# Altium PCB koruza-hs-rigid-PCB.PcbDoc
Units mm, origin at the board's own origin, x right, y up, seen from the top; angles counter-clockwise.
Board outline 41.5 x 65 mm, 2 copper layers (Top Layer, Bottom Layer), stack 0.325 mm thick; 40 components, 27 nets, 153 pads, 29 vias.
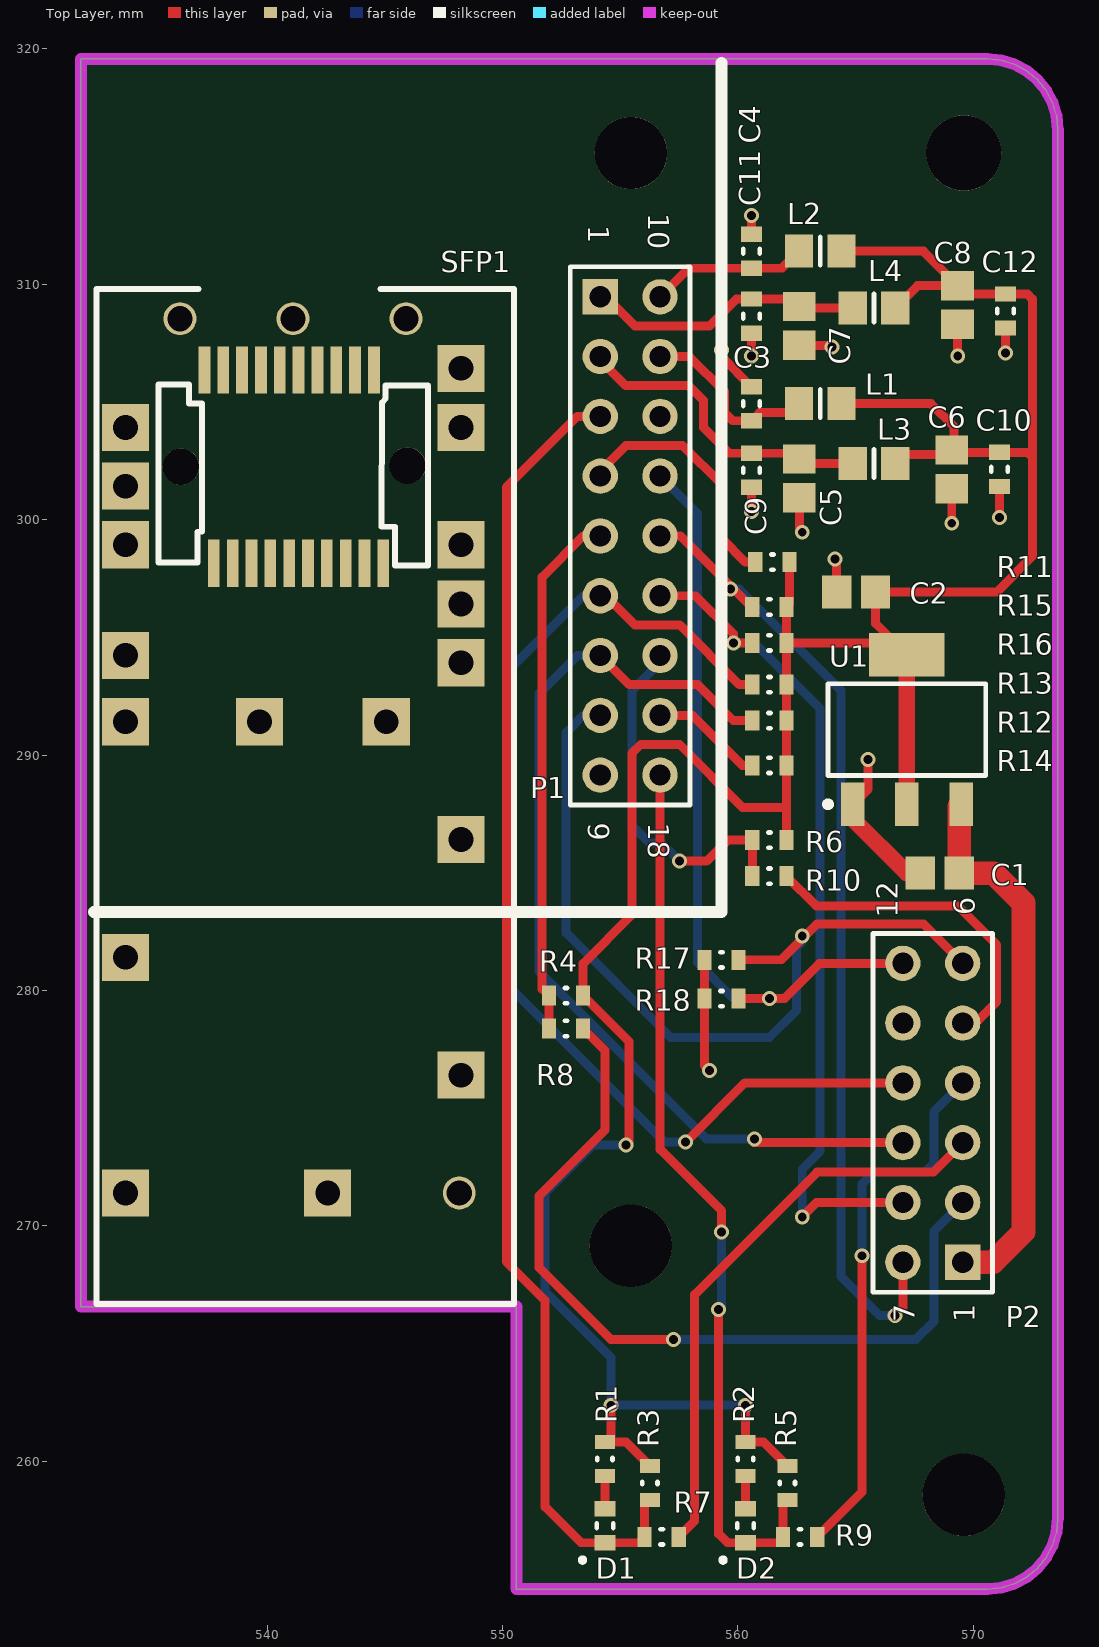
[diagram p0: Top Layer view]
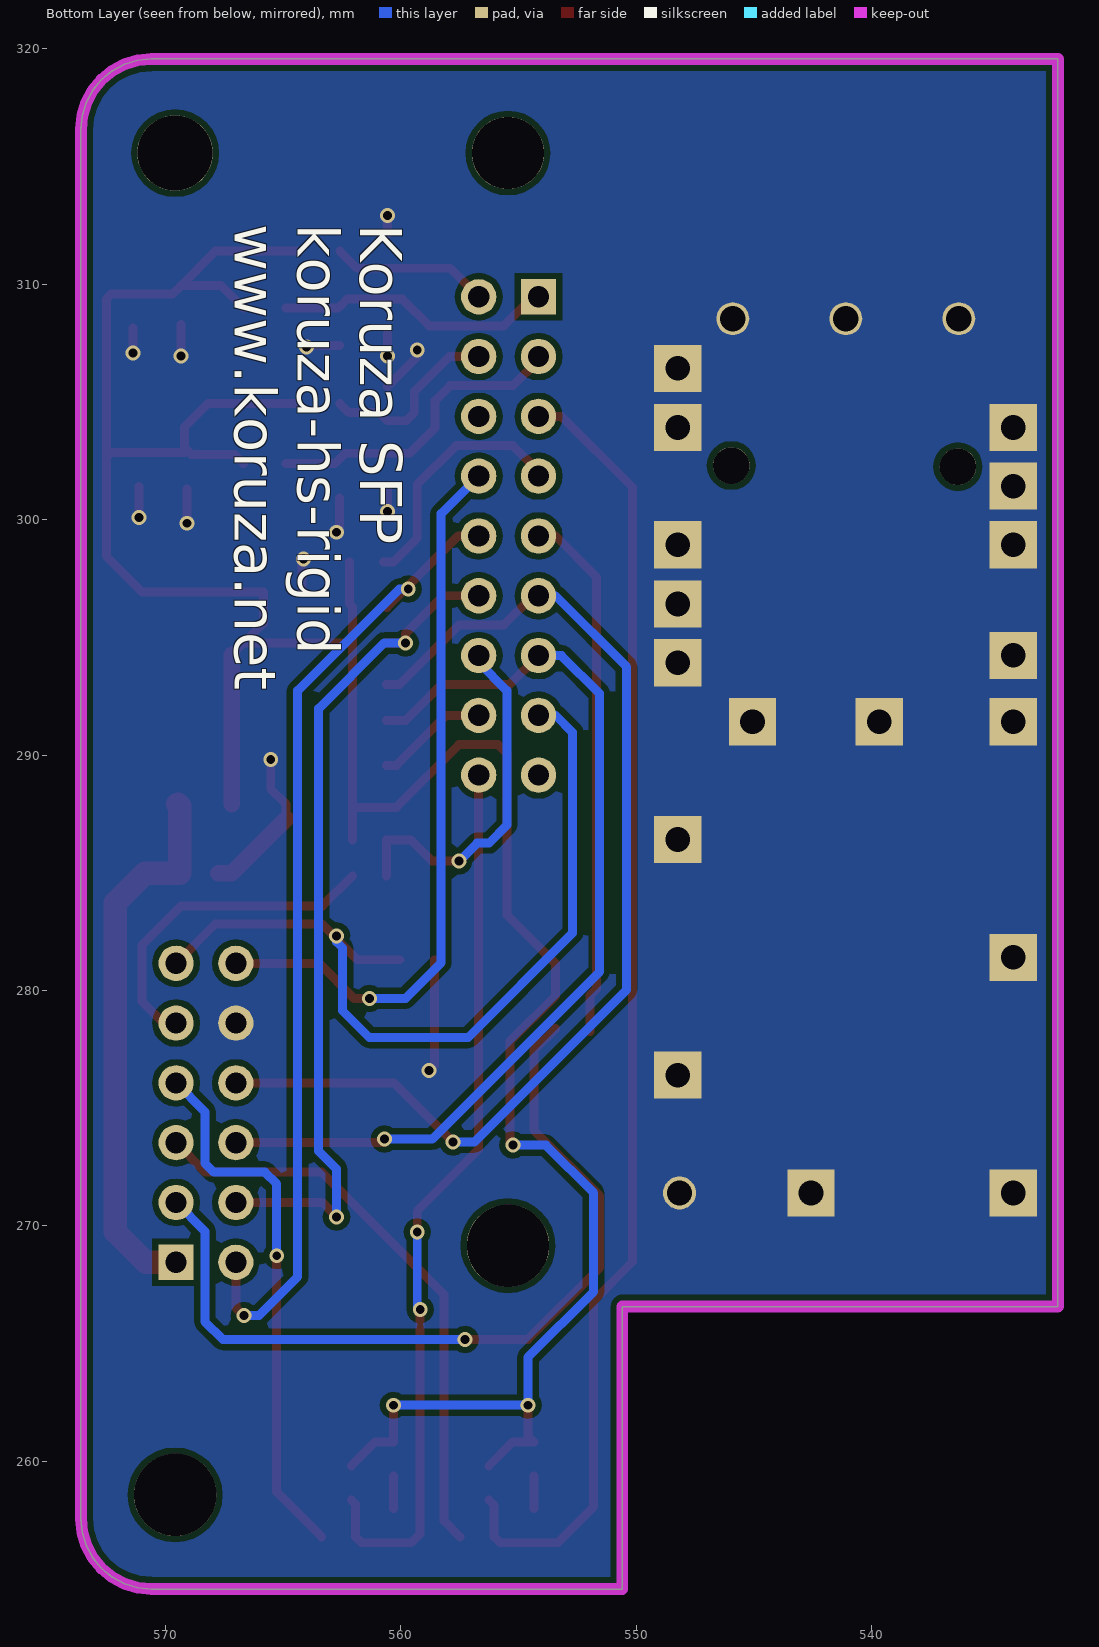
[diagram p1: Bottom Layer view, seen from below]
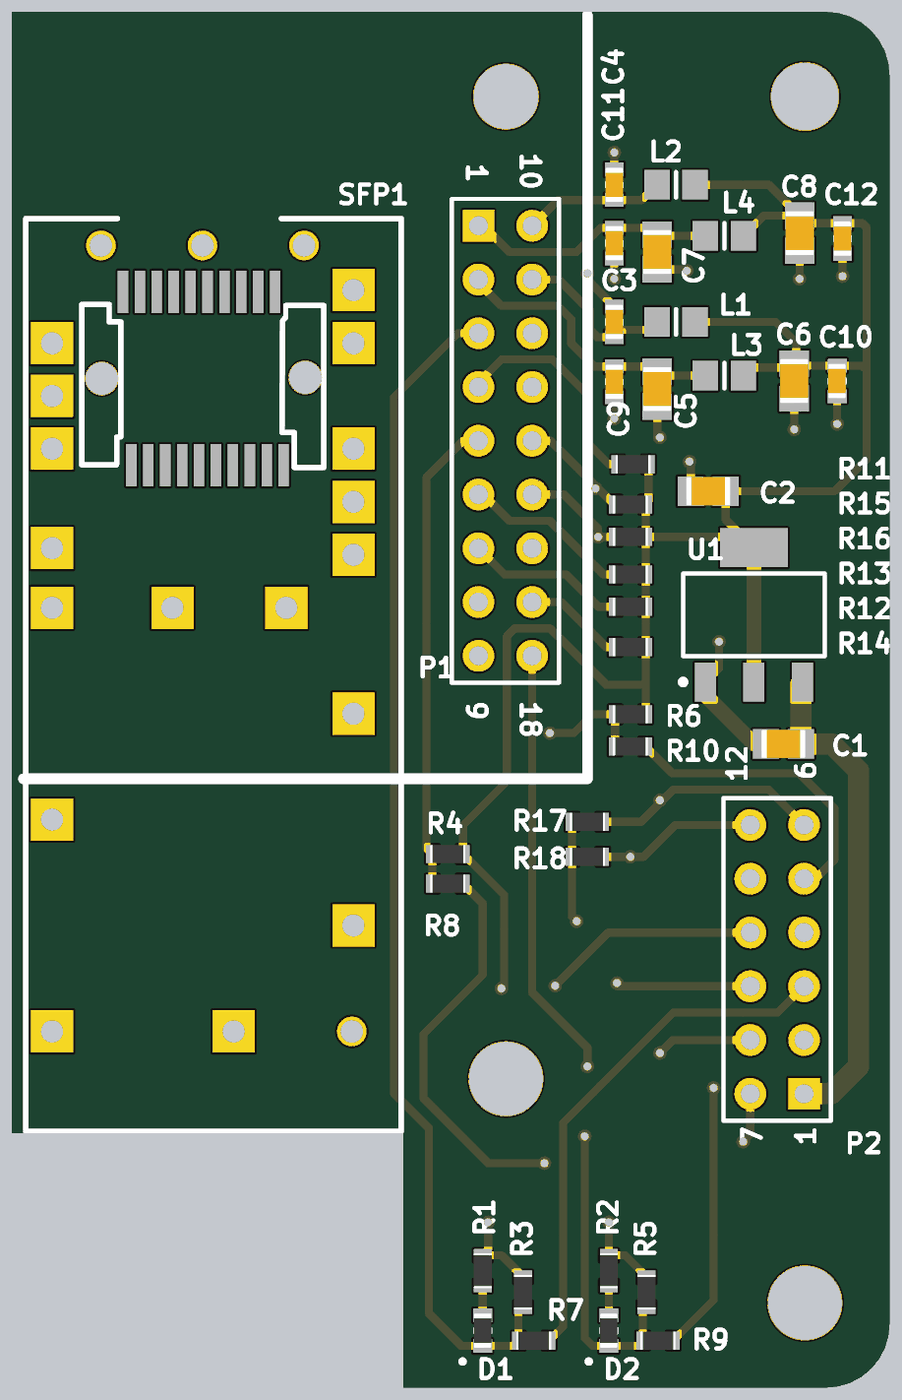
[diagram p2: 3D render of the assembled board from above, using the file's embedded part models]

## Layer stack, top to bottom
Top Solder: solder mask 0.0102, Solder Resist, Dk 3.5
Top Layer: signal copper 0.0356
Dielectric 1: core 0.254, FR-4, Dk 4.2
Bottom Layer: signal copper 0.0356
Solder Side: solder mask 0.0102, Solder Resist, Dk 3.5

## Board outline
570.595,319.572 532.095,319.572 532.095,266.572 550.595,266.572 550.595,254.572 570.595,254.572 571.18,254.63 571.743,254.8 572.262,255.078 572.716,255.451 573.089,255.905 573.367,256.424 573.537,256.987 573.595,257.572 573.595,316.572 573.537,317.157 573.367,317.72 573.089,318.239 572.716,318.693 572.262,319.066 571.743,319.344 571.18,319.514

## Design rules (kind name [scope] priority, off if disabled: settings)
Clearance Clearance_diff_polygon [InPolygon] p1: gap=0.254
Clearance [All] p2: gap=0.152
Clearance Clearance_nets_poligon [InNamedPolygon('GND_P') vs not InNet('GND')] p3 off: gap=0.254
Clearance Clearance_diff_gnd [(InDifferentialPairClass('All Differential Pairs')) and not (InPadClass('All Pads')) vs InNet('GND')] p4: gap=0.254
Clearance Clearance_diff_gnd_pad [(InDifferentialPairClass('All Differential Pairs')) vs IsPad and InNet('GND')] p5: gap=0.254
ComponentClearance [All] p1: gap=0 collisioncheckmode=3 verticalgap=0 showdistances=TRUE
DiffPairsRouting [All] p1: maxlimit=0.18 minlimit=0.175 mostfreqgap=0.178 toplayer_minwidth=0.203 toplayer_maxwidth=0.229 toplayer_prefwidth=0.216 bottomlayer_minwidth=0.203 bottomlayer_maxwidth=0.229 bottomlayer_prefwidth=0.216 maxuncoupledlength=5.08
HoleSize [All] p1: absolutevalues=TRUE maxlimit=5 minlimit=0.3 maxpercent=80.000 minpercent=20.000
MatchedLengths camera [InDifferentialPairClass('CAMERA_DIFF')] p1: tolerance=0.254 checknetsindiffpair=TRUE checkdiffpairvsdiffpair=FALSE checkxsignals=FALSE checkothers=FALSE
MinimumSolderMaskSliver [All] p1: minsoldermaskwidth=0.05
PlaneConnect [All] p1: planeconnectstyle=Direct reliefexpansion=0.508 reliefentries=2 reliefconductorwidth=0.254 reliefairgap=0.254
PolygonConnect [All] p1: connectstyle=Direct reliefconductorwidth=0.254 reliefentries=4 polygonreliefangle="90 Angle" airgapwidth=0.254
RoutingVias [All] p1: holewidth=0.38 width=0.635 viastyle="Through Hole" minholewidth=0.3 minwidth=0.508 maxholewidth=0.711 maxwidth=1.27
SilkToSolderMaskClearance [IsPad] p1: minsilkscreentomaskgap=0 clearancetoexposedcopper=TRUE
SolderMaskExpansion [All] p1: expansion=0.102
Width [All] p1: maxlimit=2 minlimit=0.152 preferedwidth=0.203 minimp=50.000000 maximp=50.000000 favimp=50.000000
24 further rules are at their usual default settings.

## Components (designator, comment, footprint, x,y, rotation, side; value= is the part's Value field where it differs from the comment)
C1 "10uF" CAP0805 568.579,284.988 r180 top
C2 "10uF" CAP0805 565.023,296.926 r180 top
C3 "100nF" CAP0603 560.578,304.927 r270 top
C4 "100nF" CAP0603 560.578,311.404 r270 top
C5 "10uF" CAP0805 562.61,301.752 r270 top
C6 "10uF" CAP0805 569.087,302.133 r270 top
C7 "10uF" CAP0805 562.61,308.229 r270 top
C8 "10uF" CAP0805 569.341,309.118 r270 top
C9 "100nF" CAP0603 560.578,302.096 r90 top
C10 "100nF" CAP0603 571.119,302.133 r90 top
C11 "100nF" CAP0603 560.578,308.647 r90 top
C12 "100nF" CAP0603 571.373,308.864 r90 top
D1 "LED0" DIODE0603 554.355,257.265 r270 top
D2 "LED0" DIODE0603 560.324,257.265 r270 top
L1 "1uH" 6-0805_N 563.499,304.927 r0 top
L2 "1uH" 6-0805_N 563.499,311.404 r0 top
L3 "1uH" 6-0805_N 565.785,302.387 r0 top
L4 "1uH" 6-0805_N 565.785,308.991 r0 top
P1 "Header 9X2A" HDR2X9_CEN 554.156,309.468 r270 top locked
P2 "Header 6X2A" HDR2X6_CEN 569.552,268.455 r90 top locked
R1 "470R" RES0603 554.355,260.096 r90 top
R2 "470R" RES0603 560.324,260.096 r90 top
R3 "0R" RES0603 556.26,259.08 r270 top
R4 "0R" RES0603 552.704,279.781 r180 top
R5 "0R" RES0603 562.102,259.08 r270 top
R6 "0R" RES0603 561.34,286.385 r180 top
R7 "0R" RES0603 556.768,256.794 r0 top
R8 "0R" RES0603 552.704,278.384 r0 top
R9 "0R" RES0603 562.647,256.794 r0 top
R10 "0R" RES0603 561.34,284.861 r0 top
R11 "0R" RES0603 561.467,298.196 r180 top
R12 "0R" RES0603 561.34,291.465 r180 top
R13 "0R" RES0603 561.34,292.989 r180 top
R14 "0R" RES0603 561.34,289.56 r180 top
R15 "0R" RES0603 561.34,296.291 r180 top
R16 "0R" RES0603 561.34,294.767 r180 top
R17 "0R" RES0603 559.308,281.305 r180 top
R18 "0R" RES0603 559.308,279.654 r180 top
SFP1 "SFP connector" PCB_SFP_COVER 537.742,298.149 r270 top
U1 "REG1117" TI-DCY4_N 567.182,291.084 r90 top

## Footprints (in the part's own frame and the unit in brackets; to place one, negate y for a bottom-side part, rotate by r counter-clockwise, add the part's x,y. Pads: shape width x height; smd on the part's side, far side on the other; paste and mask are expansions set on the pad)
6-0805_N [mm] "Chip Resistor, Body 2.0x1.2mm, IPC Medium Density"
  rect 1.2x1.4 smd: 1(-0.9,0) 2(0.9,0)
  silkscreen extent 0,-0.6 0,0.6, body extent -1.07,-0.7 1.07,0.7, height 0.7
CAP0603 [mm]
  rect 0.65x0.9 smd: 1(-0.725,0) 2(0.725,0)
  silkscreen extent -0.1,-0.35 0.1,0.35, body extent -0.82,-0.43 0.82,0.43, height 0.5
CAP0805 [mm]
  rect 1.25x1.4 smd: 1(-0.825,0) 2(0.825,0)
  body extent -1.05,-0.67 1.05,0.67, height 0.5
DIODE0603 [mm]
  rect 0.65x0.9 smd: 1(-0.725,0) 2(0.725,0)
  silkscreen extent -0.1,-1.05 1.56,0.35, body extent -0.82,-0.43 0.82,0.43, height 0.5
HDR2X6_CEN [mm] "Connector; Header; 6x2 Position"
  rect 1.5x1.5 hole 0.9: 1(0,0)
  round 1.5 hole 0.9: 2(2.54,0) 3(5.08,0) 4(7.62,0) 5(10.16,0) 6(12.7,0) 7(0,2.54) 8(2.54,2.54) 9(5.08,2.54) 10(7.62,2.54) 11(10.16,2.54) 12(12.7,2.54)
  silkscreen extent -1.27,-1.27 13.97,3.81
HDR2X9_CEN [mm] "Connector; Header; 9x2 Position"
  rect 1.5x1.5 hole 0.9: 1(0,0)
  round 1.5 hole 0.9: 2(2.54,0) 3(5.08,0) 4(7.62,0) 5(10.16,0) 6(12.7,0) 7(15.24,0) 8(17.78,0) 9(20.32,0) 10(0,2.54) 11(2.54,2.54) 12(5.08,2.54) 13(7.62,2.54) 14(10.16,2.54) 15(12.7,2.54) 16(15.24,2.54) 17(17.78,2.54) 18(20.32,2.54)
  silkscreen extent -1.27,-1.27 21.59,3.81
PCB_SFP_COVER [mm]
  rect 2x0.5 smd: 1(0,0) 2(0,0.8) 3(0,1.6) 4(0,2.4) 5(0,3.2) 6(0,4) 7(0,4.8) 8(0,5.6) 9(0,6.4) 10(0,7.2) 11(-8.2,6.8) 12(-8.2,6) 13(-8.2,5.2) 14(-8.2,4.4) 15(-8.2,3.6) 16(-8.2,2.8) 17(-8.2,2) 18(-8.2,1.2) 19(-8.2,0.4) 20(-8.2,-0.4)
  round 1.4 hole 1.067: 21(-10.387,8.163) 21(-10.387,-1.439) 21(-10.387,3.361) 21(26.75,10.425)
  rect 2x2 hole 1.05: 21(-8.279,10.499) 21(-5.764,10.499) 21(-5.764,-3.75) 21(-3.275,-3.75) 21(-0.786,10.499) 21(-0.786,-3.75) 21(1.729,10.499) 21(3.913,-3.75) 21(4.229,10.499) 21(6.733,7.324) 21(6.733,-3.75) 21(6.733,1.94) 21(11.736,10.499) 21(16.74,-3.75) 21(21.744,10.499) 21(26.748,-3.75) 21(26.748,4.835)
  round 1.55 hole 1.55: 35(-4.15,8.225) 36(-4.1,-1.4)
  silkscreen extent -11.66,-4.99 31.47,12.76
RES0603 [mm]
  rect 0.6x0.85 smd: 1(-0.725,0) 2(0.725,0)
  silkscreen extent -0.05,-0.33 0.05,0.33, body extent -0.82,-0.43 0.82,0.43, height 0.5
TI-DCY4_N [mm] "SOT223, 4-Leads, Body 6.5x3.5mm, Pitch 2.3mm, IPC Medium Density"
  rect 1.85x1 smd: 1(-3.175,2.3) 2(-3.175,0) 3(-3.175,-2.3)
  rect 1.85x3.2 smd: 4(3.175,0)
  silkscreen extent -3.3,-3.35 1.95,3.47, body extent -1.85,-3.35 1.85,3.35, height 1.8

## Part data
C1 C2 C5 C6 C7 C8: library part "Cap Pol1", "Polarized Capacitor (Radial)"
C3 C4 C9 C10 C11 C12: library part Cap, "Capacitor"
D1 D2: "Typical INFRARED GaAs LED"
L1 L2 L3 L4: library part Inductor, "Inductor"
P1: "Header, 9-Pin, Dual row"
P2: "Header, 6-Pin, Dual row"
R1 R2 R3 R4 R5 R6 R7 R8 R9 R10 R11 R12 R13 R14 R15 R16 R17 R18: library part Res1, "Resistor"
U1: "Single Output LDO, 800 mA, Adjustable 1.5 to 13.5 V Output, 3.8 to 15 V Input, with Internal Current Limiting, 4-pin SOT-223 (DCY), -40 to 125 degC, Green (RoHS & no Sb/Br)"

## Free pads (board coordinates)
  round 3.5 hole 3.5: 1(555.455,269.162) 1(569.595,258.572)
  round 3.073 hole 3.073: 1(555.455,315.572)
  round 3.2 hole 3.2: 1(569.595,315.572)

## Via types
v1: diameter 0.635, hole 0.38, Top Layer to Bottom Layer, tented both sides, 29 vias

## Nets (pads, with @x,y where several pads share a name; then routed paths per layer and width w, separated by ;. In a path a pad name is that pad's centre, name@x,y a point inside that pad or via, vN(x,y) a via of type N, cw(c..) or ccw(c..) an arc to the next point about the centre after c; other vN are vias at no path point)
+3V3: C2.1 C6.1 C8.1 C10.2 C12.2 L1.2 L2.2 L3.2 L4.2 R1.2 R2.2 R3.1 R4.1 R5.1 R6.1 R11.1 R12.1 R13.1 R14.1 R15.1 R16.1 U1.2 U1.4 | length 122.7
  Top Layer w0.381: v1(554.609,262.382) 554.609,261.075 R1.2 555.244,260.821 R3.1 ; v1(555.244,273.431) 555.371,273.558 555.371,277.839 R4.1 553.429,281.141 555.498,283.21 555.498,290.068 555.879,290.449 557.53,290.449 560.197,287.782 562.065,287.782 ; v1(560.324,262.382) R2.2 561.086,260.821 R5.1 ; R6.1 562.065,287.782 ; R11.1 562.192,296.418 R15.1 R16.1 ; L1.2 568.198,304.927 569.187,303.938 C6.1@569.187,302.858 ; L2.2 567.88,311.404 C8.1 ; L3.2 567.066,302.768 568.897,302.768 C6.1 C6.1@569.187,302.858 ; L4.2 567.637,309.943 C8.1 ; U1.4 U1.4@566.674,294.767 ; 572.389,302.768 572.299,302.858 C10.2 C6.1@569.187,302.858 ; 562.065,287.782 R14.1 R12.1 R13.1 R16.1 ; R16.1 U1.4@566.674,294.767 ; U1.4@566.674,294.767 565.848,295.593 C2.1 570.992,296.926 572.516,298.45 572.516,309.372 572.299,309.589 C12.2 569.695,309.589 C8.1
  Top Layer w0.7: U1.2 U1.4
  Bottom Layer w0.381: v1(555.244,273.431) 553.847,273.431 551.815,271.399 551.815,267.208 554.609,264.414 v1(554.609,262.382) v1(560.324,262.382)
+5V: C1.1 P2.1 U1.3 | length 23.3
  Top Layer w1: U1.3 569.404,287.831 C1.1 570.865,284.988 572.135,283.718 572.135,269.748 570.842,268.455 P2.1
GND: C1.2 C2.2 C3.1 C4.1 C5.2 C6.2 C7.2 C8.2 C9.1 C10.1 C11.1 C12.1 P2.11 R17.2 R18.2 SFP1.21 U1.1 | length 25.8
  Top Layer w0.381: R17.2 R18.2 558.583,276.823 v1(558.8,276.606) ; v1(559.308,307.213) 559.308,306.922 C3.1 ; v1(560.578,300.355) C9.1 ; v1(560.578,306.959) C11.1 ; C4.1 v1(560.578,312.928) ; C5.2 562.61,299.593 v1(562.737,299.466) ; C7.2 563.943,307.404 v1(564.007,307.34) ; v1(564.134,298.323) 564.198,298.259 C2.2 ; U1.1@564.882,287.288 U1.1 565.531,288.558 v1(565.531,289.814) ; v1(569.087,299.847) C6.2 ; v1(569.341,306.959) C8.2 ; v1(571.119,300.101) C10.1 ; v1(571.373,307.086) C12.1
  Top Layer w0.7: U1.1@564.882,287.288 567.182,284.988 C1.2
LOS_1: D1.2 P1.3 R3.2 R7.1 | length 55.8
  Top Layer w0.381: P1.3 553.181,304.388 550.164,301.371 550.164,268.478 551.815,266.827 551.815,258.064 553.339,256.54 D1.2 555.789,256.54 R7.1 556.043,258.138 R3.2
LOS_2: D2.2 P1.18 R5.2 R9.1 | length 38
  Top Layer w0.381: P1.18 556.696,273.249 559.308,270.637 v1(559.308,269.748) ; v1(559.181,266.446) 559.181,256.921 559.562,256.54 D2.2 561.668,256.54 R9.1 561.922,258.175 R5.2
  Bottom Layer w0.381: v1(559.181,266.446) 559.308,266.573 v1(559.308,269.748)
MOD_DEF_0_1: P1.5 R4.2 R8.1 | length 22.6
  Top Layer w0.381: R8.1@551.979,278.257 R4.2 551.688,280.072 551.688,297.561 553.435,299.308 P1.5
MOD_DEF_0_2: P1.16 R6.2 R10.1 | length 15.3
  Top Layer w0.381: v1(557.53,285.496) 558.673,285.496 559.562,286.385 R6.2 R10.1
  Bottom Layer w0.381: P1.16 556.696,293.933 555.498,292.735 555.498,287.02 556.26,286.258 556.768,286.258 v1(557.53,285.496)
MOD_DEF_1_1: P1.6 P2.10 R13.2 | length 47
  Top Layer w0.381: P1.6 554.386,296.768 555.625,295.529 557.53,295.529 560.07,292.989 R13.2 ; v1(557.784,273.558) 560.301,276.075 P2.10
  Bottom Layer w0.381: P1.6 553.435,296.768 550.418,293.751 550.418,280.035 556.895,273.558 v1(557.784,273.558)
MOD_DEF_1_2: P1.15 P2.8 R16.2 | length 36.2
  Top Layer w0.381: P1.15 558.196,296.768 559.816,295.148 v1(559.816,294.767) R16.2 ; v1(562.737,270.383) 563.349,270.995 P2.8
  Bottom Layer w0.381: v1(559.816,294.767) 560.705,294.767 563.499,291.973 563.499,273.177 562.737,272.415 v1(562.737,270.383)
MOD_DEF_2_1: P1.7 P2.9 R12.2 | length 41.1
  Top Layer w0.381: P1.7 555.395,292.989 558.292,292.989 559.816,291.465 R12.2 ; v1@560.705,273.535 P2.9
  Bottom Layer w0.381: P1.7 553.181,294.228 551.561,292.608 551.561,280.797 558.673,273.685 v1(560.705,273.685)
MOD_DEF_2_2: P1.14 P2.7 R15.2 | length 41.9
  Top Layer w0.381: P1.14 557.561,299.308 R15.2@560.597,296.272 ; v1(566.674,266.192) 567.012,266.53 P2.7
  Bottom Layer w0.381: v1(559.689,297.053) 560.07,297.053 564.388,292.735 564.388,267.843 566.039,266.192 v1(566.674,266.192)
NetD1_1: D1.1 R1.1 | length 1.4
  Top Layer w0.381: D1.1 R1.1
NetD2_1: D2.1 R2.1 | length 1.4
  Top Layer w0.381: D2.1 R2.1
RATE_SEL_1: P1.4 R11.2 | length 10.6
  Top Layer w0.381: P1.4 554.156,302.061 555.244,303.149 557.657,303.149 559.308,301.498 559.308,299.212 560.324,298.196 R11.2
RATE_SEL_2: P1.17 R14.2 | length 4.8
  Top Layer w0.381: P1.17 558.069,291.688 560.197,289.56 R14.2
SFP_LOS_1: P2.3 R7.2 | length 24.6
  Top Layer w0.381: R7.2 558.165,257.466 558.165,267.081 563.372,272.288 568.305,272.288 P2.3
SFP_LOS_2: P2.4 R9.2 | length 23.1
  Top Layer w0.381: R9.2 565.277,258.699 v1(565.277,268.732)
  Bottom Layer w0.381: v1(565.277,268.732) 565.277,271.78 565.785,272.288 567.944,272.288 568.325,272.669 568.325,274.848 P2.4
SFP_MOD_DEF0_1: P2.2 R8.2 | length 35.6
  Top Layer w0.381: R8.2 554.355,277.458 554.355,274.066 551.561,271.272 551.561,268.224 554.609,265.176 v1(557.276,265.176)
  Bottom Layer w0.381: v1(557.276,265.176) 567.563,265.176 568.325,265.938 568.325,269.768 P2.2
SFP_MOD_DEF0_2: P2.5 R10.2 | length 14.4
  Top Layer w0.381: R10.2 563.335,283.591 569.341,283.591 570.992,281.94 570.992,279.527 570.08,278.615 P2.5
TX_DISABLE_1: P1.8 P2.6 R17.1 | length 36.5
  Top Layer w0.381: R17.1 561.848,281.305 563.372,282.829 567.878,282.829 P2.6
  Bottom Layer w0.381: P1.8 553.435,291.688 552.704,290.957 552.704,282.448 557.149,278.003 561.34,278.003 562.483,279.146 562.483,281.813 562.737,282.067 v1(562.737,282.321)
TX_DISABLE_2: P1.13 P2.12 R18.1 | length 32.6
  Top Layer w0.381: R18.1 v1(561.34,279.654) 561.975,279.654 563.476,281.155 P2.12
  Bottom Layer w0.381: P1.13 558.292,300.252 558.292,281.178 559.816,279.654 v1(561.34,279.654)
TX_FAULT_1: P1.9
TX_FAULT_2: P1.12
VCCR_1: C5.1 C9.2 L3.1 P1.2 | length 13.4
  Top Layer w0.381: P1.2 554.156,306.777 555.244,305.689 557.911,305.689 558.546,305.054 558.546,303.911 559.636,302.821 C9.2 562.366,302.821 C5.1 562.8,302.387 L3.1
VCCR_2: C7.1 C11.2 L4.1 P1.1 | length 11.9
  Top Layer w0.381: P1.1 554.386,309.468 555.625,308.229 558.8,308.229 559.943,309.372 C11.2 562.292,309.372 C7.1 562.673,308.991 L4.1
VCCT_1: C3.2 L1.1 P1.11 | length 7.9
  Top Layer w0.381: P1.11 557.942,306.928 559.435,305.435 559.435,304.546 559.779,304.202 C3.2 560.922,304.546 562.218,304.546 L1.1
VCCT_2: C4.2 L2.1 P1.10 | length 6.7
  Top Layer w0.381: P1.10 557.907,310.679 C4.2 561.874,310.679 L2.1
pads on no net: SFP1.1 SFP1.2 SFP1.3 SFP1.4 SFP1.5 SFP1.6 SFP1.7 SFP1.8 SFP1.9 SFP1.10 SFP1.11 SFP1.12 SFP1.13 SFP1.14 SFP1.15 SFP1.16 SFP1.17 SFP1.18 SFP1.19 SFP1.20 SFP1.35 SFP1.36

## Polygon pours and split planes (outlines as drawn)
GND on Bottom Layer "GND_B" (solid, pour order 0): 570.595,319.572 532.095,319.572 532.095,266.572 550.595,266.572 550.595,254.572 570.595,254.572 571.18,254.63 571.743,254.8 572.262,255.078 572.716,255.451 573.089,255.905 573.367,256.424 573.537,256.987 573.595,257.572 573.595,316.572 573.537,317.157 573.367,317.72 573.089,318.239 572.716,318.693 572.262,319.066 571.743,319.344 571.18,319.514

## Keep-outs
Keep-Out Layer:
  the board outline again, w0.5

## Silkscreen, mask and mechanical layers (free items; w line width, h text height)
Top Overlay:
  lines w0.5: 532.638,283.337 559.308,283.337 559.308,319.405
Bottom Overlay:
  text "Koruza SFP / koruza-hs-rigid / www.koruza.net" at 567.055,312.547 h1.78 r90
Mechanical 1:
  circle w0.178: c555.455,315.572 r3
  circle w0.178: c569.595,315.572 r3
  circle w0.178: c569.595,258.572 r3
  circle w0.178: c555.455,269.162 r3

## Dimensions
555.455,315.572 to 554.156,309.468 on Mechanical 1
555.455,315.572 to 554.156,309.468 on Mechanical 1
532.095,319.572 to 573.595,316.572 on Mechanical 1
532.095,319.572 to 550.595,254.572 on Mechanical 1
532.095,266.572 to 532.095,319.572 on Mechanical 1
569.595,315.572 to 569.552,278.615 on Mechanical 1
567.012,268.455 to 569.595,258.572 on Mechanical 1

## Text inside footprints (layer, text, board x,y; h text height)
P1: Top Overlay "18" at 556.188,287.116 h0.89 r270; Top Overlay "9" at 553.648,287.116 h0.89 r270; Top Overlay "1" at 553.648,312.516 h0.89 r270; Top Overlay "10" at 556.188,313.024 h0.89 r270
P2: Top Overlay "12" at 566.801,283.083 h0.89 r90; Top Overlay "6" at 570.06,283.187 h0.89 r90; Top Overlay "1" at 570.06,265.915 h0.89 r90; Top Overlay "7" at 567.52,265.915 h0.89 r90